# EAGLE board schema_10 (EAGLE 9.1.0)
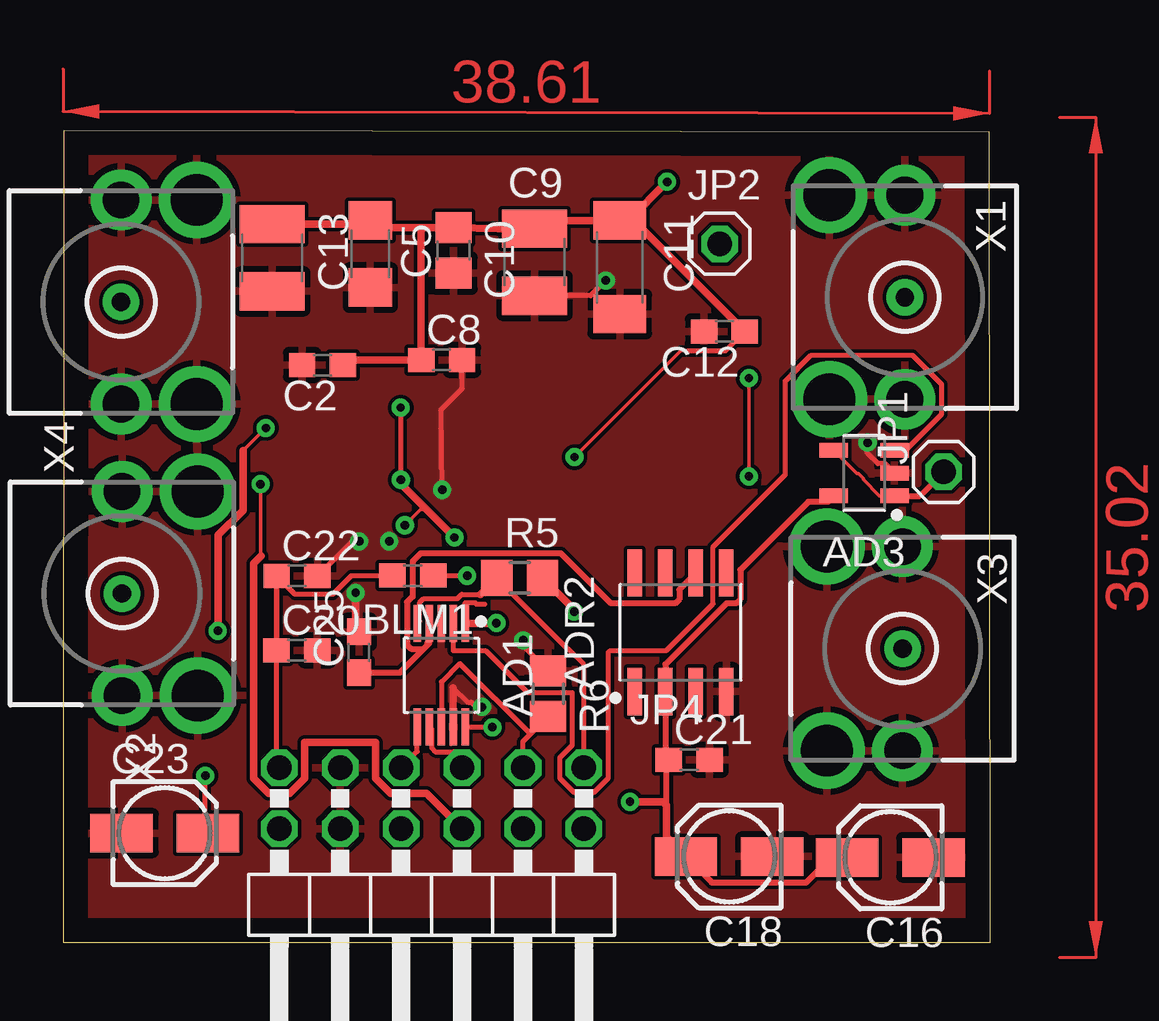
[diagram p0: board, top side]
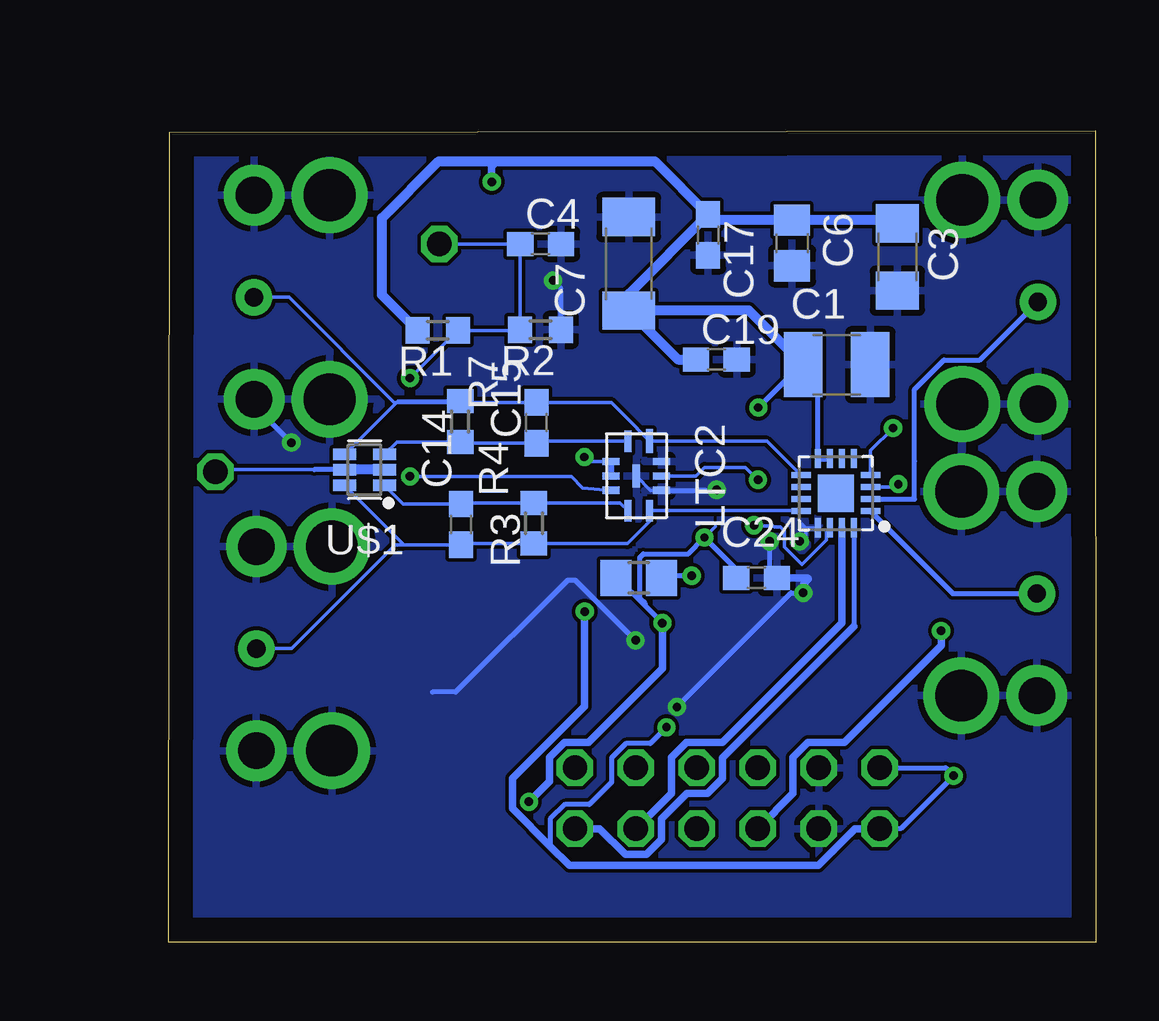
[diagram p1: board, bottom side, seen from below]

Size 38.64 x 33.83 mm. Coordinates in mm from the lower left corner, seen from the top.
Outline: 0,0 38.64,0 38.6,33.77 0.01,33.83 0,0
Copper layers (1*16): Top 0.035mm / dielectric 1.5mm / Bottom 0.035mm
Design rules "default": minimum track width 6mil, minimum drill 0.35mm, track to track 6mil, track to pad 6mil, pad to pad 6mil, via to via 6mil, smd to smd 6mil, copper to edge 40mil, drill to drill 6mil, minimum pad ring 10mil, minimum via ring 8mil, stop-mask expansion 4mil, vias tented up to drill 0mil, thermal gap 10mil

## Footprints (pad centres in the part's own frame; a part is rotated, then mirrored left to right if it is on the bottom)
SOP50P490X110-10 = smd 1.55 x 0.297: 1 -2.156,1; 2 -2.156,0.5; 3 -2.156,0; 4 -2.156,-0.5; 5 -2.156,-1; 6 2.156,-1; 7 2.156,-0.5; 8 2.156,0; 9 2.156,0.5; 10 2.156,1
SOT95P280X145-5 = smd 1.186 x 0.597: 1 -1.264,0.95; 2 -1.264,0; 3 -1.264,-0.95; 4 1.264,-0.95; 5 1.264,0.95
SOIC127P600X175-8 = smd 1.968 x 0.599: 1 -2.473,1.905; 2 -2.473,0.635; 3 -2.473,-0.635; 4 -2.473,-1.905; 5 2.473,-1.905; 6 2.473,-0.635; 7 2.473,0.635; 8 2.473,1.905
C1608 = smd 1.1 x 1: 1 -0.85,0; 2 0.85,0
C1210 = smd 1.6 x 2.7: 1 -1.4,0; 2 1.4,0
C0603 = smd 1.1 x 1: 1 -0.85,0; 2 0.85,0
C1206 = smd 1.6 x 1.8: 1 -1.4,0; 2 1.4,0
C0805 = smd 1.3 x 1.5: 1 -0.95,0; 2 0.95,0
C1808 = smd 1.6 x 2.2: 1 -1.95,0; 2 1.95,0
153CLV-0405 = smd 2.6 x 1.6: + 1.8,0; - -1.8,0
1X01 = drill 1.016 octagon: 1 0,0
2X06/90 = drill 1.016 octagon: 1 -6.35,-6.35; 2 -6.35,-3.81; 3 -3.81,-6.35; 4 -3.81,-3.81; 5 -1.27,-6.35; 6 -1.27,-3.81; 7 1.27,-6.35; 8 1.27,-3.81; 9 3.81,-6.35; 10 3.81,-3.81; 11 6.35,-6.35; 12 6.35,-3.81
LTC6409_1 = smd 0.9 x 0.3: IN+ -1.45,-0.35; IN- 1.45,-0.35; OUT+ 1.45,0.55 | smd 1 x 0.3: OUT- -1.45,0.55 | smd 0.3 x 0.7: SHDN -0.6,-1.05; V+ 0,-1.05; V++ 0,1.05; V- -0.6,1.05; V-- 0.6,1.05; VOCM 0.6,-1.05 | smd 0.95 x 0.3: V--- 0,0
R0603 = smd 1 x 1.1: 1 -0.85,0; 2 0.85,0
R0805 = smd 1.3 x 1.5: 1 -0.95,0; 2 0.95,0
QFN50P300X300X90-16 = smd 0.81 x 0.25: 1 -1.445,0.75; 2 -1.445,0.25; 3 -1.445,-0.25; 4 -1.445,-0.75; 9 1.445,-0.75; 10 1.445,-0.25; 11 1.445,0.25; 12 1.445,0.75 | smd 0.25 x 0.81: 5 -0.75,-1.445; 6 -0.25,-1.445; 7 0.25,-1.445; 8 0.75,-1.445; 13 0.75,1.445; 14 0.25,1.445; 15 -0.25,1.445; 16 -0.75,1.445 | smd 1.5 x 1.55: PIN#1 0,0
SOTFL65P210X100-6 = smd 0.956 x 0.472: 1 -0.836,0.65; 2 -0.836,0; 3 -0.836,-0.65; 4 0.836,-0.65; 5 0.836,0; 6 0.836,0.65
SMA-142-0701-871 = drill 0.762 pad 1.524: 1 0,0 | drill 1.524 pad 2.54: 2@1 -4.255,0; 2@2 4.255,0 | drill 2.159 pad 2.794: 2@3 -4.255,-3.15; 2@4 4.255,-3.15

## Placement (x,y rotation side)
AD1  0  [SOP50P490X110-10]  15.76,11.13 270 top
AD3  0  [SOT95P280X145-5]  33.39,19.55 180 top
ADR2  ADR441N  [SOIC127P600X175-8]  25.73,12.92 90 top
BLM1  0  [C1608]  14.57,15.28 0 top
C1  10u  [C1210]  10.8,24.07 0 bottom
C2  0.1u  [C0603]  10.81,24.06 180 top
C3  1000p  [C1206]  8.27,28.56 270 bottom
C4  0.1u  [C0603]  23.14,29.1 0 bottom
C5  1000p  [C1206]  12.8,28.69 270 top
C6  100p  [C0805]  12.65,29.14 270 bottom
C7  0.01u  [C1808]  19.46,28.28 90 bottom
C8  0.1u  [C0603]  15.77,24.27 0 top
C9  0.47u  [C1210]  19.64,28.35 270 top
C10  100p  [C0805]  16.27,28.84 270 top
C11  0.01u  [C1808]  23.2,28.13 270 top
C12  0.1u  [C0603]  27.56,25.46 180 top
C13  0.47u  [C1210]  8.71,28.53 270 top
C14  10p  [C0603]  26.46,17.41 270 bottom
C15  10p  [C0603]  23.32,21.65 90 bottom
C16  10u  [153CLV-0405]  34.47,3.53 180 top
C17  0.1u  [C0603]  16.15,29.48 270 bottom
C18  0.1u  [153CLV-0405]  27.76,3.57 180 top
C19  1u  [C0603]  15.81,24.29 0 bottom
C20  1u  [C0603]  9.74,12.17 0 top
C21  0.1u  [C0603]  26.09,7.6 0 top
C22  0.1u  [C0603]  9.74,15.27 0 top
C23  10u  [153CLV-0405]  4.23,4.55 0 top
C24  1u  [C0603]  14.14,15.18 0 bottom
C25  0.1u  [C0603]  12.33,12.09 90 top
JP1  0  [1X01]  36.7,19.6 270 top
JP2  0  [1X01]  27.36,29.11 0 top
JP4  0  [2X06/90]  15.35,0.92 180 top
LTC2  0  [LTC6409_1]  19.15,19.44 270 bottom
R1  500  [R0603]  27.42,25.5 180 bottom
R2  500  [R0603]  23.14,25.53 180 bottom
R3  500  [R0603]  23.42,17.46 270 bottom
R4  500  [R0603]  26.49,21.71 90 bottom
R5  10k  [R0805]  19.02,15.18 0 top
R6  10k  [R0805]  20.21,10.36 270 top
R7  1.5  [R0805]  19.05,15.19 180 bottom
SY1  SY89873LN  [QFN50P300X300X90-16]  10.83,18.71 180 bottom
U$1  UM6K34N1  [SOTFL65P210X100-6]  30.48,19.69 180 bottom
X1  SMA-142-0701-871/880  [SMA-142-0701-871]  35.08,26.88 270 top
X2  SMA-142-0701-871/880  [SMA-142-0701-871]  2.45,14.53 90 top
X3  SMA-142-0701-871/880  [SMA-142-0701-871]  34.98,12.24 270 top
X4  SMA-142-0701-871/880  [SMA-142-0701-871]  2.41,26.69 90 top

## Library data of the parts
AD1 AD3 ADR2 BLM1 LTC2 SY1 U$1 = mylibrary
C1-C3 C5-C13 = rcl
C4 C14 C15 C17-C22 C24 C25 = rcl; SPICEPREFIX: C
C16 C23 R3 R4 = resistor
JP1 JP2 JP4 = pinhead
R1 R2 R5-R7 = rcl; SPICEPREFIX: R
X1-X4 = con-coax; MF: JOHNSON COMPONENTS; MPN: 142-0701-871; OC_FARNELL: 1339835; OC_NEWARK: 91B6105

## Nets
0: AD1.3 AD1.9 AD3.2 ADR2.4 C1.2 C2.2 C3.2 C4.2 C5.2 C6.2 C7.2 C8.2 C9.2 C10.2 C11.2 C12.2 C13.2 C16.- C17.2 C18.- C19.2 C20.2 C21.2 C22.2 C23.- C24.2 C25.2 JP4.9 JP4.10 LTC2.V- LTC2.V-- LTC2.V--- R2.1 R6.1 SY1.13 X1.2@1 X1.2@2 X1.2@3 X1.2@4 X2.2@1 X2.2@2 X2.2@3 X2.2@4 X3.2@1 X3.2@2 X3.2@3 X3.2@4 X4.2@1 X4.2@2 X4.2@3 X4.2@4
3IN+: AD1.2 AD3.3
+3V3: AD1.1 AD3.5 ADR2.2 C1.1 C2.1 C3.1 C5.1 C6.1 C7.1 C8.1 C9.1 C10.1 C11.1 C12.1 C13.1 C16.+ C17.1 C18.+ C19.1 C21.1 C24.1 LTC2.SHDN LTC2.V+ LTC2.V++ R1.2 R7.2 SY1.7 SY1.8 SY1.14
CS: AD1.5 JP4.1 R5.1
DIN: AD1.7 JP4.5
DVDD: AD1.10 BLM1.1 C20.1 C22.1 C23.+ JP4.11 JP4.12 R5.2
IN: C14.2 LTC2.OUT+ R3.2 SY1.12 U$1.6 X3.1
INN: C15.2 LTC2.OUT- R4.2 SY1.9 U$1.4 X1.1
LDAC: AD1.8 JP4.3 R6.2
LIN+: C15.1 LTC2.IN+ R4.1 U$1.3
LIN-: C14.1 LTC2.IN- R3.1 U$1.1
N$7: BLM1.2 R7.1
QB0: SY1.1 X2.1
QB0N: SY1.2 X4.1
QB1: JP4.6 SY1.3
QB1N: JP4.8 SY1.4
S0: JP4.2 SY1.16
S1: JP4.4 SY1.15
SCLK: AD1.6 JP4.7
VCTRL: AD3.1 AD3.4 JP1.1 U$1.2 U$1.5
VOCM: C4.1 JP2.1 LTC2.VOCM R1.1 R2.2
VREF2V5: AD1.4 ADR2.6 C25.1

## Tracks (layer width: path | path; a pad name or v marks a point on that pad's centre or on a via)
0  (via drill 0.35)
  Top 0.152: v12.33,16.71 12.03,16.71
  Top 0.2: R6.1 19.17,12.34 v19.17,12.58 | v15.79,18.86 15.76,22.21 16.62,23.08 C8.2 | 16.26,10.6 16.86,10 17.01,10 17.2,9.8 v17.45,9.8 | C22.2 11.98,16.65 12.03,16.71 | AD3.2 34.25,19.95 33.95,19.95 33.53,20.38 v33.53,20.82 | v22.61,27.58 21.98,26.95 C9.2
  Top 0.305: AD1.9 16.26,10.6 | v12.19,14.56 12.19,13.08 C25.2
  Bottom 0.152: LTC2.V-- 18.55,18.84 LTC2.V--- | 12.08,17.27 12.25,17.44 12.29,17.4 12.29,17.29 12.27,17.27 SY1.13 12.08,17.27 | 12.34,17.27 12.08,17.27 | 12.08,17.27 12.08,16.96 v12.33,16.71
  Bottom 0.2: v19.17,12.58 21.67,15.08 22.02,15.08 26.67,10.43 27.65,10.43 | LTC2.V-- 16.5,18.83 15.91,18.83 v15.79,18.86 | v17.45,9.8 12.69,14.56 v12.19,14.56 | v13.59,16.71 13.59,15.48 C24.2 | v33.53,20.82 35.08,22.38 X1.2@2 | R2.1 22.29,27.26 v22.61,27.58
  Bottom 0.305: C24.2 12,15.18 11.96,15.14 12.19,14.92 v12.19,14.56
  pour Top: 0.33,33.57 38.31,33.57 38.38,33.64 38.38,0.4 38.29,0.31 0.41,0.31 0.31,0.41 0.31,33.57 0.32,33.57
  pour Bottom: 0.38,33.62 38.42,33.62 38.48,33.57 38.48,0.19 38.48,0.19 0.14,0.19 0.14,33.62 0.18,33.66
3IN+
  Top 0.2: AD1.2 16.26,12.16 17.6,12.16 19.35,10.4 21.21,10.4 21.21,8.21 20.69,7.69 20.69,6.85 21.28,6.25 22.12,6.25 22.72,6.85 22.72,12.08 22.79,12.16 25.14,12.16 27.09,14.1 27.09,16.48 30.09,19.48 30.09,23.39 31.17,24.47 35.39,24.47 36.6,23.26 36.6,22 35.11,20.5 AD3.3
+3V3  (via drill 0.35)
  Top 0.152: v21.31,20.22 25.75,24.66 26.04,24.66 | v14.24,17.38 14.89,18.03 15.14,18.03
  Top 0.2: v14.07,19.28 14.07,22.17 14.06,22.18 v14.06,22.28 | AD1.1 16.76,14.15 17.17,14.15 17.23,14.1 17.56,14.1 | 26.04,24.66 27.61,24.66 C12.1
  Top 0.254: 25.14,7.7 25.1,7.75 ADR2.2 25.1,11.58 27.64,14.13 28.05,14.13 28.22,14.29 28.22,15.52 31.06,18.36 31.88,18.36 AD3.5 | 25.14,7.7 C21.1 | 25.14,5.71 25.14,7.7 | C16.+ 32.01,3.53 30.97,2.49 27.03,2.49 C18.+
  Top 0.305: C13.1 12.64,29.93 C5.1 13.1,29.79 14.8,29.79 | 14.8,29.79 C10.1 18.12,29.75 C9.1 19.98,30.08 C11.1 23.55,30.08 | 14.8,29.79 14.92,29.66 C8.1 11.87,24.27 C2.1 | 23.55,30.08 23.79,30.08 C12.1 28.19,25.46 | C18.+ 25.14,4.38 25.14,5.71 25.01,5.85 v23.63,5.85 v23.62,5.85 | v25.17,31.7 23.55,30.08 | AD1.1 18.01,13.28 18.04,13.32 v18.06,13.3 | v16.3,16.87 15.14,18.03 14.07,19.1 v14.07,19.28
  Bottom 0.152: SY1.14 11.23,17.12 11.23,16.77 12.25,15.75 12.98,16.48 12.98,17.14 13.14,17.3 13.39,17.3 13.44,17.35 14.26,17.35 14.26,17.36 v14.24,17.38 | 15.85,17.33 16.34,16.83 | LTC2.V++ 16.66,19.44 16.3,19.79 14.59,19.79 v14.07,19.28 | LTC2.SHDN 21.16,20.04 21.31,20.19 v21.31,20.22
  Bottom 0.2: SY1.8 11.58,23.46 C1.1 12.27,24.07 v14.06,22.28 | C24.1 14.99,15.55 v16.3,16.87 16.34,16.83 16.98,16.19 18.85,16.19 19,16.04 19,14.33 18.77,14.11 18.77,14.02 | v18.06,13.3 18.77,14.02 | 18.77,14.02 19.95,15.19 R7.2
  Bottom 0.254: SY1.8 SY1.7 | LTC2.SHDN LTC2.V+
  Bottom 0.305: v18.06,13.3 18.06,11.42 21.14,8.34 22.15,8.34 22.77,7.71 22.77,6.71 v23.62,5.85 | 24.94,32.55 25.17,32.32 v25.17,31.7 25.17,31.68
  Bottom 0.406: C3.1 8.4,30.09 C6.1 15.92,30.09 C17.1 | C17.1 19.46,27.03 C7.1 | C7.1 17.42,24.29 C19.1 | C1.1 14.45,26.33 C7.1 | R1.2 29.75,26.98 29.75,30.19 27.39,32.55 24.94,32.55 18.38,32.55 C17.1
CS
  Top 0.2: R5.1 18.75,14.5 21.05,12.21 21.06,12.21 21.7,11.57 JP4.1 | AD1.5 14.86,13.38 14.86,14.16 15.02,14.33 16.43,14.33 16.6,14.5 17.39,14.5
  Top 0.305: 17.39,14.5 R5.1
DIN
  Top 0.2: JP4.5 16.62,7.6 16.28,7.94 15.5,7.94 15.36,8.09 15.36,8.87 AD1.7
DVDD  (via drill 0.35)
  Top 0.2: 8.89,15.03 C22.1 9.65,14.51 11.25,14.51 12.01,15.28 BLM1.1 | 8.89,15.03 C20.1 | JP4.11 8.89,7.38 8.89,15.03 | C23.+ 5.92,4.66 v5.92,6.94 | AD1.10 17.91,8.97 17.93,8.95 17.9,8.95 v17.89,8.96
  Top 0.305: R5.2 21.36,13.79 21.36,13.78 v21.3,13.78
  Bottom 0.2: JP4.12 8.13,4.73 v5.92,6.94 6.25,7.27 JP4.11 | v17.89,8.96 18.56,8.28 19.58,8.28 20.18,7.69 20.18,6.67 21.1,5.74 22.12,5.74 22.73,5.13 22.73,4
  Bottom 0.305: JP4.12 10.03,4.73 11.56,3.2 21.94,3.2 22.73,4 24.31,5.57 24.31,6.82 21.3,9.83 v21.3,13.78
IN
  Bottom 0.152: X3.1 33.52,12.24 29.19,16.56 28.83,16.56 | 28.83,16.56 C14.2 26.41,16.61 R3.2 19.52,16.61 18.6,17.54 LTC2.OUT+ 12.3,17.99 SY1.12 | 28.83,16.56 U$1.6
INN
  Bottom 0.152: 26.43,22.5 C15.2 20.19,22.5 19.12,21.43 19.12,21.41 LTC2.OUT- 13.7,20.89 SY1.9 | X1.1 33.62,26.88 29.24,22.5 26.43,22.5 | 26.43,22.5 R4.2 29.08,22.56 31.29,20.34 U$1.4
LDAC
  Top 0.2: JP4.3 19.16,8.36 19.47,8.67 | R6.2 19.49,8.69 19.47,8.67 | AD1.8 15.76,10.85 16.53,11.62 19.47,8.67
LIN+
  Bottom 0.152: U$1.3 29.13,20.86 R4.1 26.43,20.8 C15.1 23.23,20.89 LTC2.IN+
LIN-
  Bottom 0.152: U$1.1 28.86,18.26 C14.1 26.41,18.31 R3.1 19.82,18.31 LTC2.IN-
N$7  (via drill 0.35)
  Top 0.2: BLM1.2 v16.83,15.28
  Bottom 0.2: R7.1 18.01,15.28 v16.83,15.28 | v16.83,15.28 v16.83,15.29 v16.83,15.28
QB0
  Bottom 0.2: SY1.1 5.96,14.53 X2.1
QB0N
  Bottom 0.2: SY1.2 7.55,18.46 7.55,20.04 7.55,23.04 6.32,24.27 4.82,24.27 X4.1
QB1  (via drill 0.35)
  Top 0.152: v8.22,19.1 8.22,16.12 8.24,16.1
  Top 0.305: JP4.6 15.15,6.2 13.64,6.2 13.02,6.83 13.02,8.34 10.07,8.34 10.07,6.83 9.45,6.2 8.56,6.2 7.94,6.83 7.94,15.79 8.24,16.1
  Bottom 0.152: SY1.3 8.34,18.97 v8.22,19.1
QB1N  (via drill 0.35)
  Top 0.152: v8.44,21.43 7.49,20.49
  Top 0.305: 7.49,20.49 7.49,18 6.46,16.97 6.46,13 v6.44,12.98
  Bottom 0.152: SY1.4 9.39,20.48 v8.44,21.43
  Bottom 0.305: v6.44,12.98 6.44,12.37 10.48,8.34 11.99,8.34 12.61,7.71 12.61,6.2 JP4.8
S0
  Bottom 0.2: SY1.16 10.08,13.16
  Bottom 0.305: 10.08,13.16 15.56,7.69 15.56,6.83 16.18,6.2 17.04,6.2 18.1,5.15 18.1,4.29 18.72,3.66 19.61,3.66 20.67,4.73 JP4.2
S1
  Bottom 0.305: SY1.15 10.58,13.31 15.56,8.34 17.07,8.34 17.69,7.71 17.69,6.2 JP4.4
SCLK
  Top 0.2: AD1.6 14.76,7.94 JP4.7
VCTRL
  Top 0.152: AD3.1 34.02,18.6 33.35,19.28 33.35,19.33 33.14,19.54 33.09,19.54 AD3.4
  Top 0.254: AD3.1 35.7,18.6 JP1.1
  Bottom 0.152: 32.57,19.69 36.6,19.69
  Bottom 0.2: U$1.5 32.57,19.69
  Bottom 0.406: U$1.2 U$1.5 | 36.6,19.69 JP1.1
VOCM  (via drill 0.35)
  Top 0.152: v28.58,19.41 v28.58,23.51
  Bottom 0.152: LTC2.VOCM 21.38,18.94 21.84,19.4 28.58,19.4 v28.58,19.41 | v28.58,23.51 26.59,25.5 R1.1 24.01,25.5 R2.2 C4.1 27.35,29.1 JP2.1
VREF2V5
  Top 0.254: AD1.4 15.25,12.58 | 15.25,12.58 15.25,12.46 14.03,11.24 C25.1 | ADR2.6 25.68,14.7 25.68,14.29 25.51,14.13 22.82,14.13 20.74,16.21 14.9,16.21 14.56,15.87 14.56,14.4 14.33,14.17 14.33,12.39 14.49,12.23 15.02,12.23 15.19,12.39 15.19,12.51 15.25,12.58
(copper drawn outside any net)
  shapes: Top area x2